# Altium PCB TMR_MAGSAT.PcbDoc
Units mm, origin at the board's own origin, x right, y up, seen from the top; angles counter-clockwise.
Board outline 56.29 x 51.29 mm, 4 copper layers (Top Layer, Layer 2(GND), Layer 3(PWR), Bottom Layer), stack 0.926 mm thick; 33 components, 20 nets, 115 pads, 15 vias.
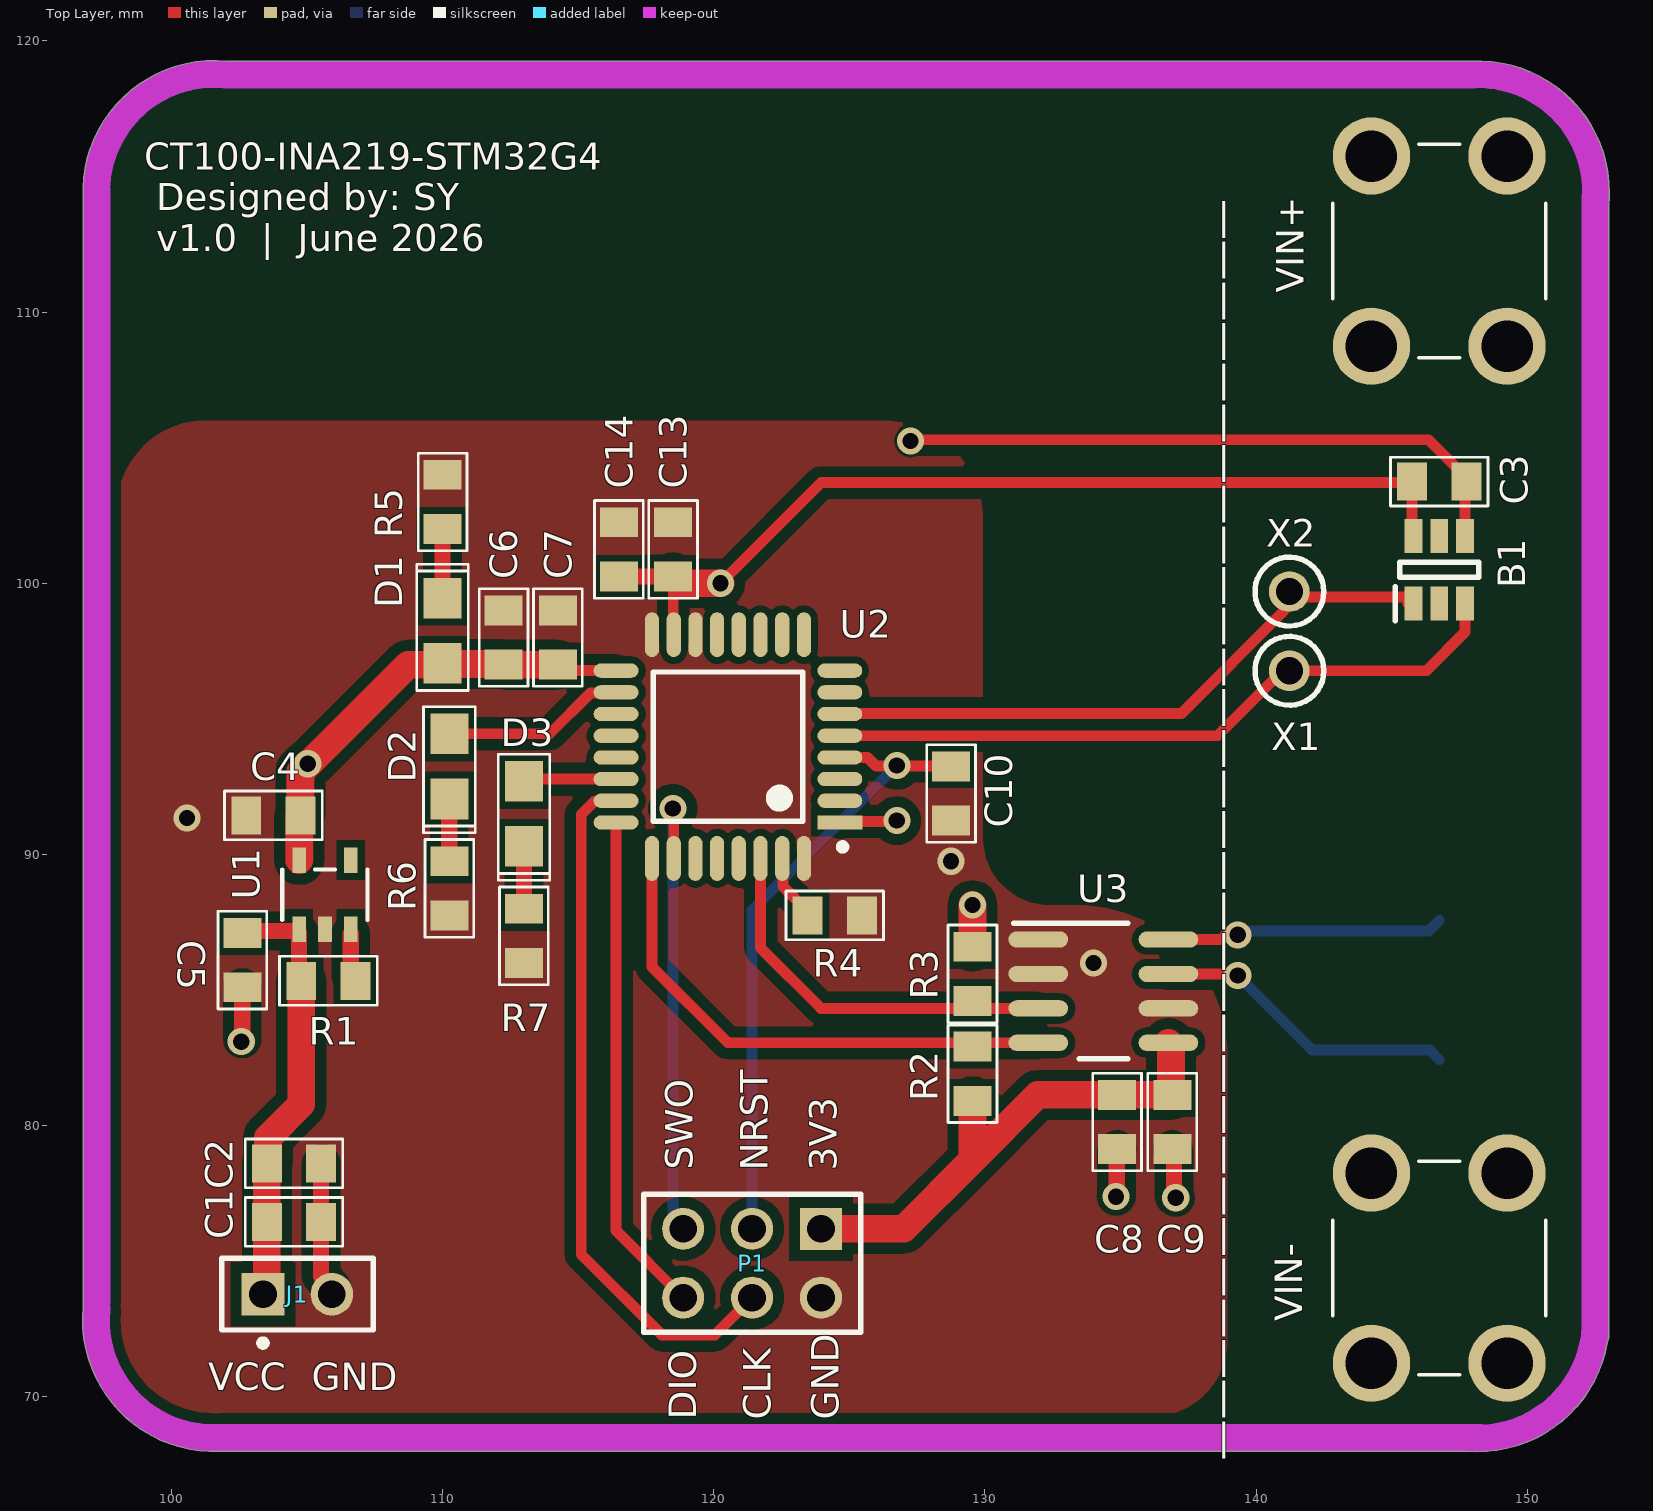
[diagram p0: Top Layer view]
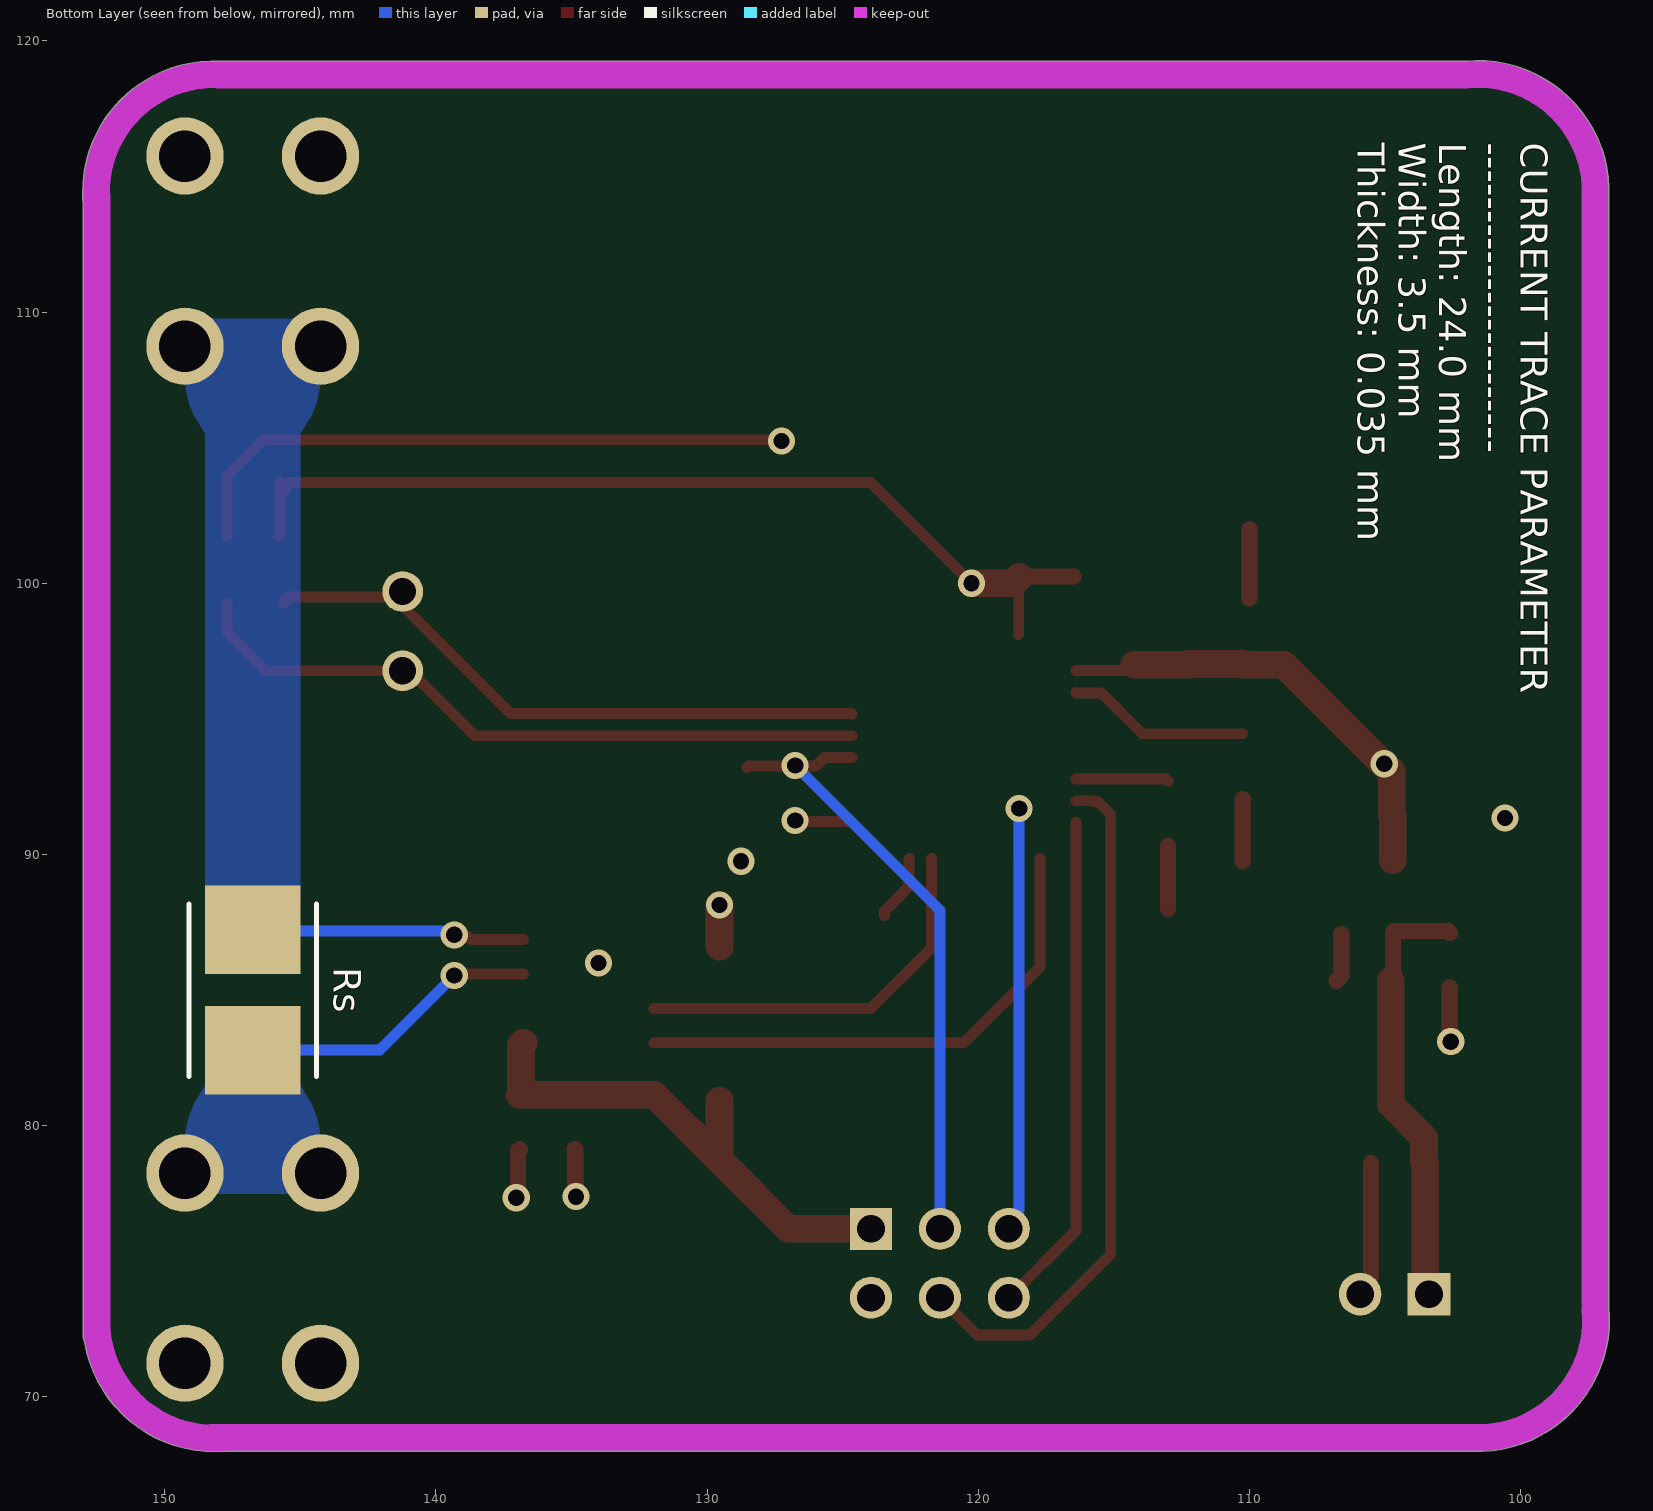
[diagram p1: Bottom Layer view, seen from below]
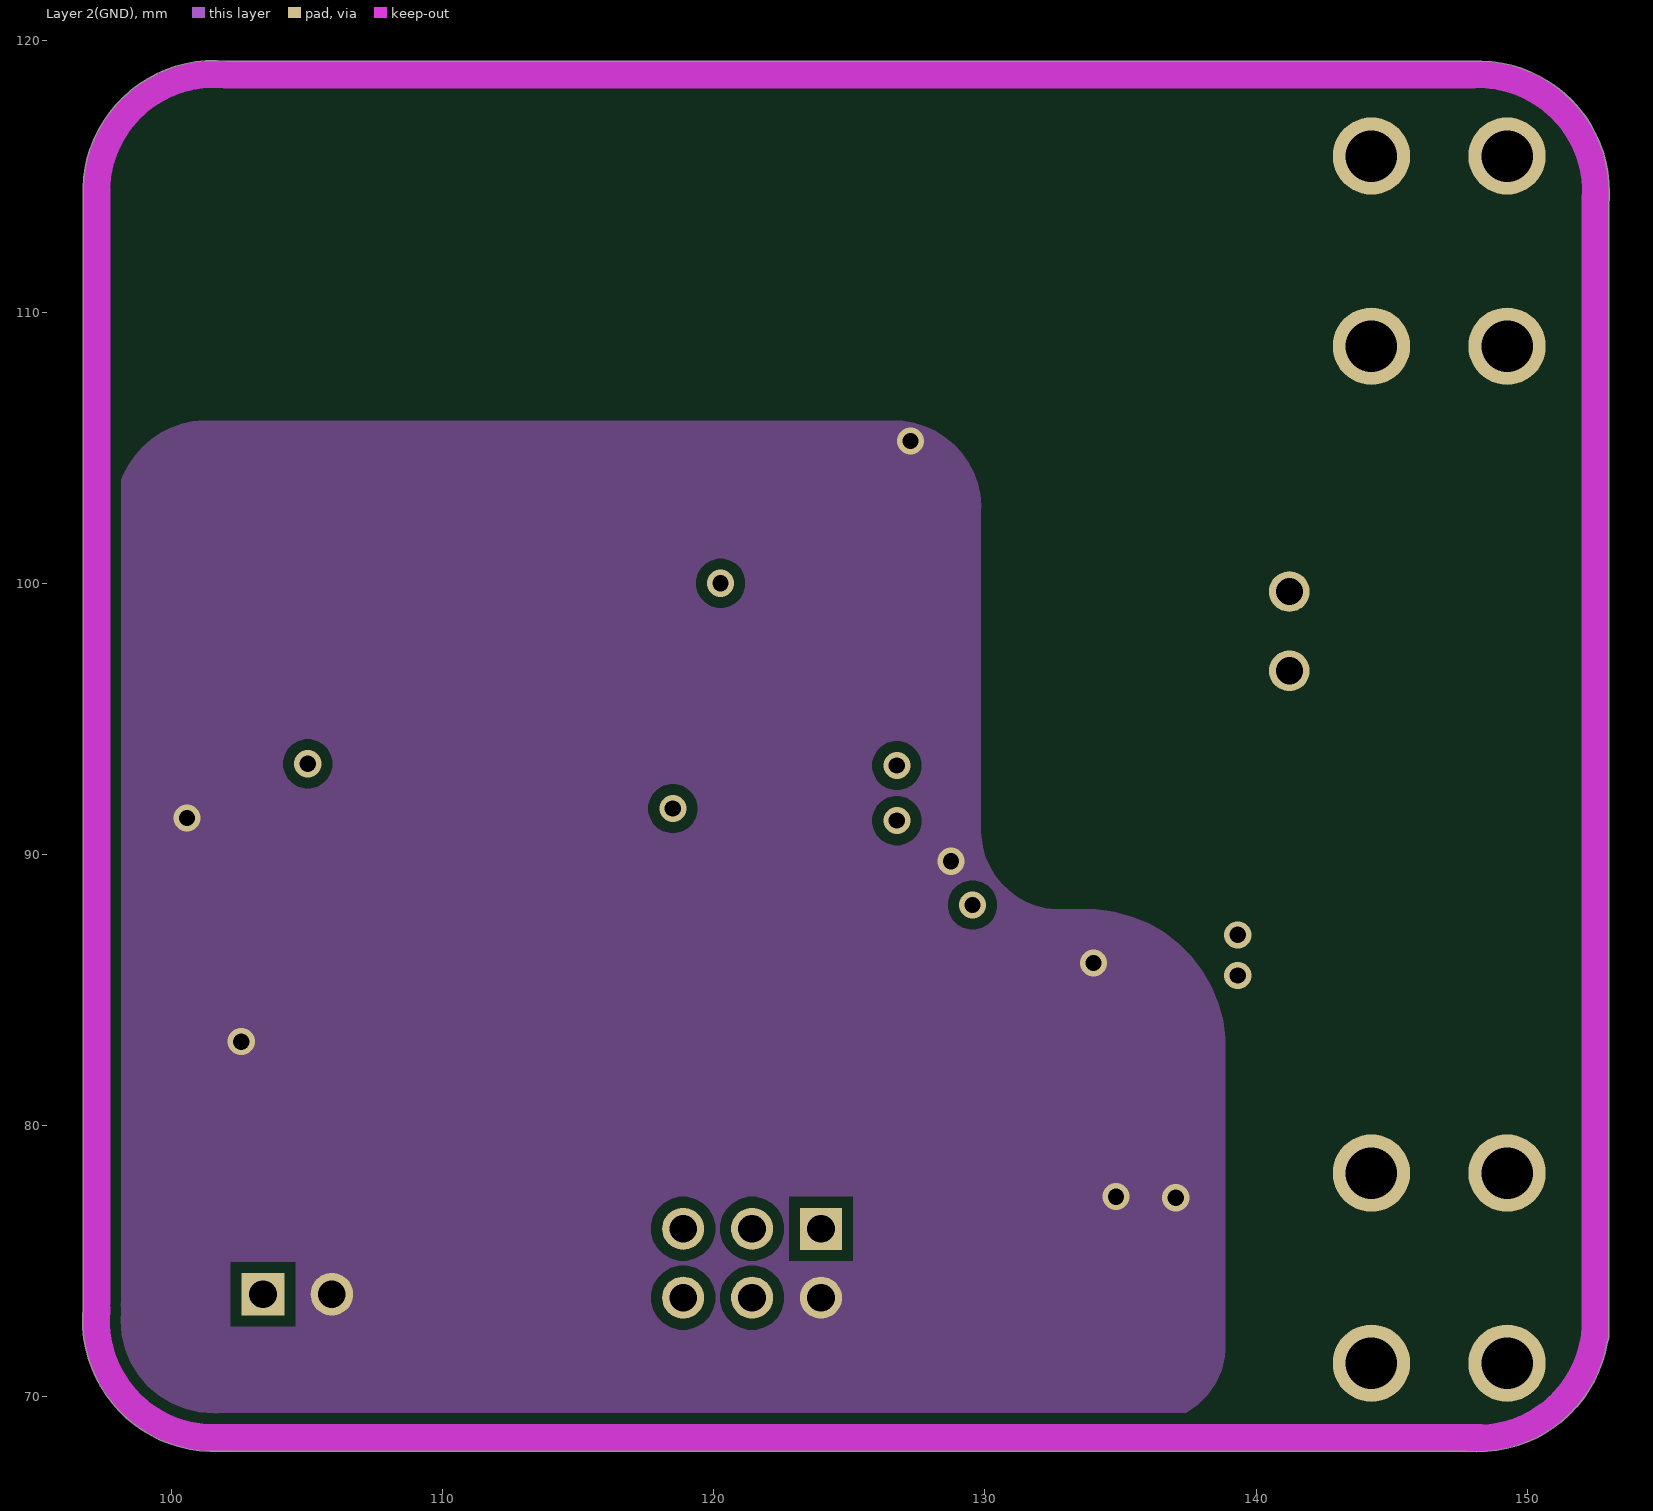
[diagram p2: Layer 2(GND)]
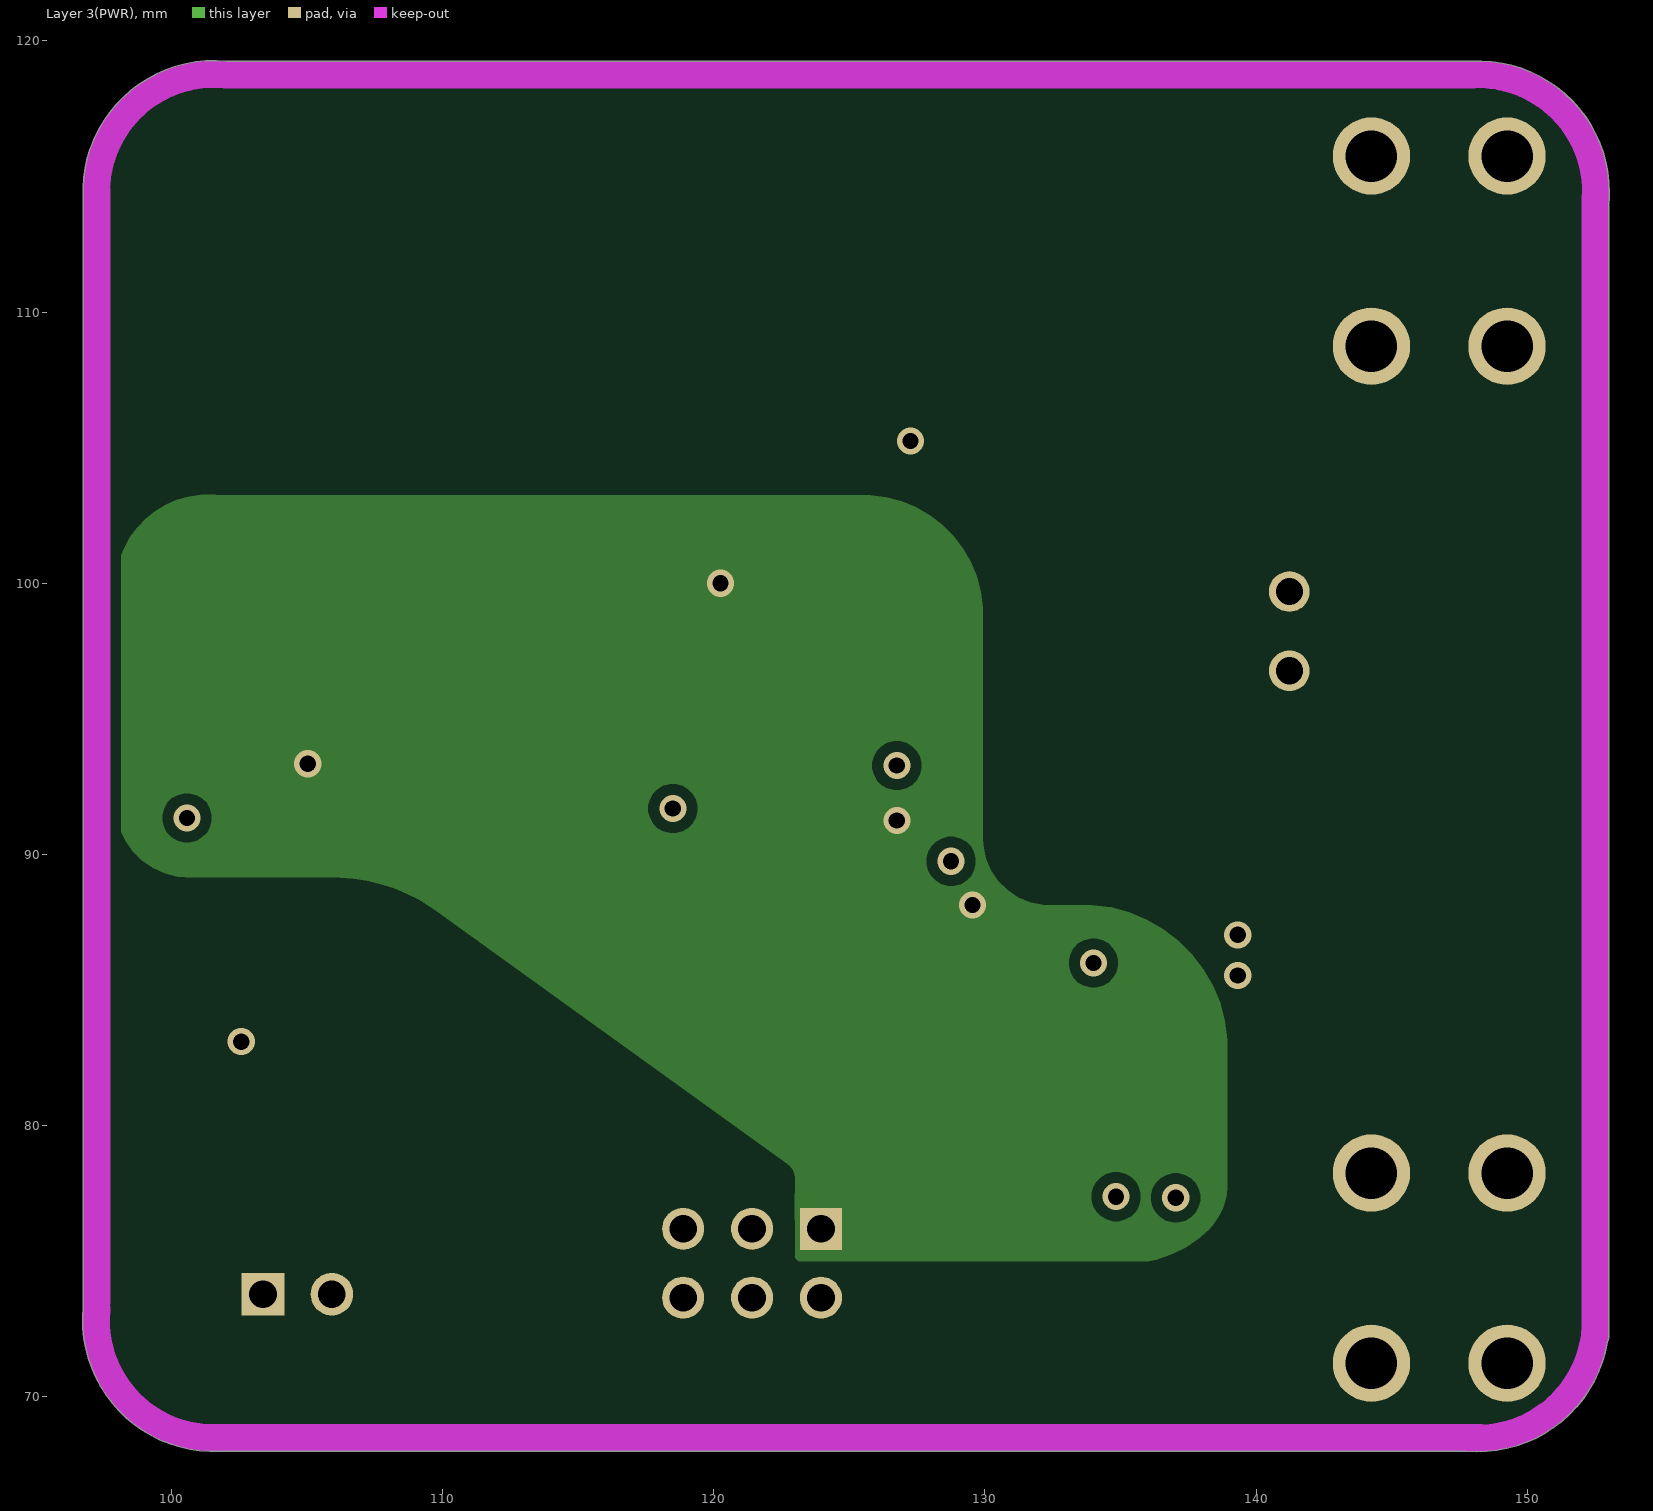
[diagram p3: Layer 3(PWR)]

## Layer stack, top to bottom
Top Solder: solder mask 0.0254, SM-001, Dk 4
Top Layer: signal copper 0.035
Dielectric 4: prepreg 0.1295, PP-017, Dk 4.3
Dielectric 2: prepreg 0.1295, PP-017, Dk 4.3
Layer 2(GND): signal copper 0.009
Dielectric 1: dielectric 0.32, FR-4, Dk 4.8
Layer 3(PWR): signal copper 0.009
Dielectric 3: prepreg 0.1295, PP-017, Dk 4.3
Dielectric 5: prepreg 0.1295, PP-017, Dk 4.3
Bottom Layer: signal copper 0.035
Bottom Solder: solder mask 0.0254, SM-001, Dk 4

## Board outline
96.752,73.299 ccw(c101.566,72.828) 101.806,67.997 101.836,68 147.726,68 ccw(c148.172,72.816) 152.942,72.016 ccw(c152.5,72.25) 153,72.25 153,72.531 ccw(c148.172,72.816) 153.009,72.816 ccw(c148.176,72.816) 153.003,73.056 153,73.087 153,113.976 ccw(c148.184,114.422) 153.021,114.422 ccw(c148.184,114.422) 147.944,119.253 147.913,119.25 102.024,119.25 ccw(c101.578,114.434) 96.747,114.194 96.75,114.163

## Design rules (kind name [scope] priority, off if disabled: settings)
Clearance [All] p1: gap=0.4 ignorepadtopadclearanceinfootprint=TRUE except(0.254: Track-SMDPad SMDPad-Poly)
Height [All] p1: minheight=0 maxheight=20 prefheight=12.7
HoleSize [All] p1: absolutevalues=TRUE maxlimit=10 minlimit=0.4 maxpercent=80.000 minpercent=20.000
PolygonConnect [All] p1: connectstyle=Direct reliefconductorwidth=0.6 reliefentries=4 polygonreliefangle="90 Angle" airgapwidth=0.4
RoutingVias [All] p1: holewidth=0.711 width=1.27 viastyle="Through Hole" minholewidth=0.711 minwidth=1.27 maxholewidth=0.711 maxwidth=1.27
SilkToSilkClearance [All] p1: silktosilkclearance=0.1
SilkToSolderMaskClearance [IsPad] p1: minsilkscreentomaskgap=0.1 clearancetoexposedcopper=TRUE
SolderMaskExpansion [All] p1: expansion=0.102 istentingtop=FALSE
Width [All] p1: maxlimit=1.016 minlimit=0.4 preferedwidth=0.6
26 further rules are at their usual default settings.

## Components (designator, comment, footprint, x,y, rotation, side; value= is the part's Value field where it differs from the comment)
B1 "CT100LW-FS6" SOT95P280X135-6N 146.75,100.5 r90 top
C1 "100n" "0805 CAP" 104.521,76.454 r0 top
C2 "100n" "0805 CAP" 104.521,78.613 r0 top
C3 "100n" "0805 CAP" 146.75,103.75 r0 top
C4 "1u" "0805 CAP" 103.759,91.44 r180 top
C5 "1u" "0805 CAP" 102.616,86.106 r270 top
C6 "4.7u" "0805 CAP" 112.25,98 r90 top
C7 "100n" "0805 CAP" 114.25,98 r90 top
C8 "10u" "0805 CAP" 134.874,80.137 r270 top
C9 "100n" "0805 CAP" 136.906,80.137 r270 top
C10 "100n" "0805 CAP" 128.75,92.25 r270 top
C13 "1u" "0805 CAP" 118.5,101.25 r90 top
C14 "10n" "0805 CAP" 116.5,101.25 r90 top
D1 "LTST-C170KGKT" "0805 LED" 110,98.25 r90 top
D2 "LTST-C170KGKT" "0805 LED" 110.25,93.25 r270 top
D3 "LTST-C170KGKT" "0805 LED" 113,91.5 r270 top
J1 "M20-9990245" FP-M20-9990245-MFG 104.648,73.787 r0 top
P1 "MTSW-103-07-F-D-244" SMTC-MTSW-103-07-X-D-244 123.952,76.2 r180 top
R1 "280" "0805 RES" 105.791,85.344 r0 top
R2 "10k" "0805 RES" 129.54,81.915 r270 top
R3 "10k" "0805 RES" 129.54,85.598 r90 top
R4 "10k" "0805 RES" 124.46,87.757 r180 top
R5 "120" "0805 RES" 110,103 r270 top
R6 "330" "0805 RES" 110.25,88.75 r90 top
R7 "330" "0805 RES" 113,87 r90 top
Rs "PA2512FKM7W0R001E" FP-PA2512E-0R001-0R004-IPC_A 146.75,85 r90 bottom value=1mΩ
U1 "NCP161ASN330T1G" SOT23_527AH_ONS 105.664,88.519 r90 top
U2 "STM32G431KBT6" FP-LQFP32-5V-IPC_B 120.523,93.98 r180 top
U3 "INA219AIDR" D0008A_N 134.366,84.963 r0 top
VIN+ "7771" KEYSTONE_7771 146.75,112.25 r180 top
VIN- "7771" KEYSTONE_7771 146.75,74.75 r180 top
X1 "5003" TP_TH 141.224,96.774 r270 top
X2 "5003" TP_TH 141.224,99.695 r270 top

## Footprints (in the part's own frame and the unit in brackets; to place one, negate y for a bottom-side part, rotate by r counter-clockwise, add the part's x,y. Pads: shape width x height; smd on the part's side, far side on the other; paste and mask are expansions set on the pad)
"0805 CAP" [mm] "http://www.digikey.co.nz/Web%20Export/Supplier%20Content/Vishay_8026/PDF/VishayBeyschlag_SolderPad.pdf?redirected=1 with dimension G modified by +0.25mm"
  rect 1.1x1.4 smd: 1(-1,0) 2(1,0)
  silkscreen extent -1.8,-0.9 1.8,0.9, body extent -1.04,-0.66 1.04,0.66, height 0.61
"0805 LED" [mm] "RED AS AlGaAs SMD LED, Body; 2mm x 1.25 mm (LxW)"
  rect 1.5x1.4 smd: 1(-1.2,0) 2(1.2,0)
  silkscreen extent -2.2,-0.95 2.45,0.95, body extent -1,-0.63 1,0.63, height 1.1
"0805 RES" [mm] "http://www.digikey.co.nz/Web%20Export/Supplier%20Content/Vishay_8026/PDF/VishayBeyschlag_SolderPad.pdf?redirected=1 with dimension G modified by +0.25mm"
  rect 1.1x1.4 smd: 1(-1,0) 2(1,0)
  silkscreen extent -1.8,-0.9 1.8,0.9, body extent -1.04,-0.66 1.04,0.66, height 0.61
D0008A_N [mm]
  oval 2.2x0.6 smd paste+0 mask+0.051: 1(-2.4,1.905) 2(-2.4,0.635) 3(-2.4,-0.635) 4(-2.4,-1.905) 5(2.4,-1.905) 6(2.4,-0.635) 7(2.4,0.635) 8(2.4,1.905)
  silkscreen extent -3.3,-2.5 0.9,2.5
FP-LQFP32-5V-IPC_B [mm]
  rect 1.655x0.526 smd paste+0 mask+0: 1(-4.125,2.8)
  rrect100% 1.655x0.526 smd paste+0 mask+0: 2(-4.125,2) 3(-4.125,1.2) 4(-4.125,0.4) 5(-4.125,-0.4) 6(-4.125,-1.2) 7(-4.125,-2) 8(-4.125,-2.8) 17(4.125,-2.8) 18(4.125,-2) 19(4.125,-1.2) 20(4.125,-0.4) 21(4.125,0.4) 22(4.125,1.2) 23(4.125,2) 24(4.125,2.8)
  rrect100% 0.526x1.655 smd paste+0 mask+0: 9(-2.8,-4.125) 10(-2,-4.125) 11(-1.2,-4.125) 12(-0.4,-4.125) 13(0.4,-4.125) 14(1.2,-4.125) 15(2,-4.125) 16(2.8,-4.125) 25(2.8,4.125) 26(2,4.125) 27(1.2,4.125) 28(0.4,4.125) 29(-0.4,4.125) 30(-1.2,4.125) 31(-2,4.125) 32(-2.8,4.125)
  silkscreen extent -4.35,-2.75 2.75,3.82, body extent -5.2,-5.2 5.2,5.2, height 0.25
FP-M20-9990245-MFG [mm]
  rect 1.57x1.57 hole 1.02 paste-2539.97 mask+0: 1(-1.27,0)
  round 1.57 hole 1.02 paste-2539.97 mask+0: 2(1.27,0)
  silkscreen extent -2.79,-1.92 2.79,1.32, body extent -2.89,-1.42 2.89,1.42, height 0.25
FP-PA2512E-0R001-0R004-IPC_A [mil]
  rect 128.5x139.17 smd paste+0 mask+0: 1(-87.42,0) 2(87.42,0)
  silkscreen extent -125,-93 125,93, body extent -125,-63 125,63, height 35
KEYSTONE_7771 [mm]
  round 2.85 hole 1.9: 1_1(-2.5,-3.505) 1_2(2.5,-3.505) 1_3(2.5,3.505) 1_4(-2.5,3.505)
  silkscreen extent -3.94,-3.94 3.94,3.94, body extent -3.26,-4.39 4.61,3.48, height 15.51
SMTC-MTSW-103-07-X-D-244 [mm] "Assembly .025\" [.64] SQ Post Terminal Strip, 2x3 Pins, Vertical, 2.54mm Pitch, Male"
  rect 1.55x1.55 hole 1.02: 1(0,0)
  round 1.55 hole 1.02: 2(0,2.54) 3(2.54,0) 4(2.54,2.54) 5(5.08,0) 6(5.08,2.54)
  silkscreen extent -1.46,-1.27 6.54,3.81, body extent -1.27,-1.27 6.35,3.81, height 8.74
SOT23_527AH_ONS [mil]
  rect 37.28x20 smd paste+0 mask+0: 1(-50.14,37.4) 2(-50.14,0) 3(-50.14,-37.4) 4(50.14,-37.4) 5(50.14,37.4)
  silkscreen extent -37,-62 37,62, body extent -55,-57 55,57, height 57
SOT95P280X135-6N [mm]
  rect 1.25x0.65 smd: 1(-1.25,0.95) 2(-1.25,0) 3(-1.25,-0.95) 4(1.25,-0.95) 5(1.25,0) 6(1.25,0.95)
  silkscreen extent -1.88,-1.45 0.28,1.63
TP_TH [mm] "Test Point, Through Hole, Dia 2.54mm"
  round 1.5 hole 1: 1(0,0)
  silkscreen extent -1.27,-1.27 1.27,1.27, body extent -1.27,-1.27 1.27,1.27, height 4.57

## Part data
B1: "Board Mount Hall Effect / Magnetic Sensors Differential TMR High Sensitivity Magnetic 1D Linear  Sensor ,SOT23 - 6 pin Package, F-Temp", Manufacturer_Name="Allegro Microsystems", Geometry.Height=1.35mm, Manufacturer_Part_Number=CT100LW-FS6
C1 C2 C3 C4 C5 C6 C7 C8 C9 C10 C13 C14: library part CerCap_SMT_0805, "SMT ceramic capacitor 0805 size"
D1 D2 D3: library part LED_SMT_0805, "SMT LED 0805 size", Color=Green, Current - Test=20mA, Lens Color=Colorless, Manufacturer="Lite-On Inc.", Millicandela Rating=35mcd, Package / Case="0805 (2012 Metric)", Supplier Part Number 1=160-1414-1-ND, Voltage - Forward (Vf) (Typ)=2V, Category=Optoelectronics, ComponentLink1Description=http://optoelectronics.liteon.com/upload/download/DS22-2000-073/LTST-C170KGKT.pdf, ComponentLink1URL=http://optoelectronics.liteon.com/upload/download/DS22-2000-073/LTST-C170KGKT.pdf, Features=-, Height (Max)=1.10mm, Lens Style/Size="Rectangle with Flat Top, 1.40mm x 1.25mm", Lens Transparency=Clear, Manufacturer Part Number=LTST-C170KGKT, Mounting Type="Surface Mount", Packaging="Cut Tape (CT)", Part Status=Active, Pricing 1="1=0.62, 10=0.459, 25=0.338, 100=0.2415, 250=0.16416, 500=0.14486, 1000=0.11347 (NZD)", RoHS="RoHS Compliant", Size / Dimension="2.00mm L x 1.25mm W", Stock 1=503069, Supplier 1=Digi-Key, Viewing Angle=130°, Wavelength - Dominant=571nm, Wavelength - Peak=574nm
J1: library part CMP-15831-000105-1, "CONN HEADER VERT 2POS 2.54MM", Case/Package=SIL, Color=Black, Contact Resistance=25mR, Current=3A, Flammability Rating="UL94 V-0", Insulation Resistance=10GR, Max Operating Temperature=105°C, Min Operating Temperature=-40°C, Package Quantity=1000, Voltage=50V, Voltage Rating (AC)=750V, Connector Type="Male Pin", Contact Finish - Mating=GOLD, Contact Material=Brass, Contact Mating Length=0.24inch, Contact Plating=Gold, Contact Shape=Square, Contact Type="Male Pin", Current Rating=3A, Depth=2.54mm, Fastening Type=Pull, Gender=Male, Height=0.12inch, Housing Color=Black, Housing Material=Nylon, Insulation Color=Black, Insulation Material=Nylon, Lead Pitch=2.54mm, Length=5.08mm, Mated Stacking Heights=16.54mm, Mating Cycles=300, Max Current Rating=3A, Mount="Through Hole", Number of Contacts=2, Number of Poles=2, Number of Positions=2, Number of Rows=1, Orientation=Straight, Packaging=Bulk, Pitch=2.54mm, Radiation Hardening=No, Reach SVHC Compliant=Yes, Series=M20, Termination=Solder, Weight=0.25lb, Width=0.25inch, Working Voltage=750V
P1: library part CMP-1024-00098-1, "Modified .025\" SQ Post Header, Through-hole, Vertical, -55 to 125 degC, 2.54 mm Pitch, 6-Pin, Male, RoHS", Manufacturer=Samtec, Temperature Range="-55 to 125 degC", ComponentLink1Description="Manufacturer URL", ComponentLink1URL=http://www.samtec.com, ComponentLink2Description=Datasheet, ComponentLink2URL=http://www.samtec.com/documents/webfiles/pdf/MTSW.PDF, ComponentLink3Description="Package Specification", ComponentLink3URL=http://www.samtec.com/documents/webfiles/cpdf/MTSW-XXX-XX-X-X-XXXX-XX-XXX-MKT1.pdf, DatasheetVersion=F-214, Mounting Technology=Through-hole, Orientation=Vertical, PackageDescription="Assembly .025\" [.64] SQ Post Terminal Strip", PackageReference=MTSW-103-07-X-D-244, PackageVersion="BI, 2/1987", PartNumber=MTSW-103-07-F-D-244, Pitch="2.54 mm", RoHS=True
R1 R2 R3 R4 R5 R6 R7: library part Res_SMT_0805, "0805 resistor", ComponentLink1Description=https://nz.mouser.com/datasheet/2/315/AOA0000C304-1149620.pdf, LatestRevisionDate=17-Jul-2002, LatestRevisionNote="Re-released for DXP Platform.", PackageReference=AXIAL-0.4, Published=8-Jun-2000, Publisher="Altium Limited"
Rs: library part CMP-03412-024792-1, "METAL CURRENT SENSOR 2512 1% 75P", Manufacturer=Yageo, Package=PA2512E-0R001-0R004, Power Rating=2W, Resistance=1mΩ, Temperature="-55°C to +170°C", Temperature Coefficient=75ppm/°C, Temperature Range High=+170°C, Temperature Range Low=-55°C, Tolerance=1%, Automotive=Yes, Automotive Grade="Grade 0", Category=Res, ComponentLink2Description=Datasheet, ComponentLink2URL=http://www.yageo.com/documents/recent/PYu-PA_E_51_RoHS_10.pdf, Composition="Metal Element", Device Class L1="Passive Components", Device Class L2=Resistors, Device Class L3="Chip SMD Resistors", Digikey Description="METAL CURRENT SENSOR 2512 1% 75P", Height=0.88mm, Ipc Land Pattern Name=RESC635318X63, Lead Free=Yes, Manufacturer Part Number=PA2512FKM7W0R001E, Octopart=https://octopart.com/pa2512fkm7w0r001e-yageo-94661137, RoHS=TRUE, Series=PA_E
U1: "Description", Manufacturer_Name=onsemi, Copyright="Copyright (C) 2026 Ultra Librarian. All rights reserved.", Manufacturer_Part_Number=NCP161ASN330T1G, RefDes=RefDes, Type=Type
U2: library part CMP-12105-000140-1, "IC MCU 32BIT 128KB FLASH 32LQFP"
U3: "26-V 12-bit I2C output digital power monitor 8-SOIC -40 to 125", Alternate_PartNumber=INA219BID, Manufacturer="Texas Instruments", PartNumber=INA219BIDR, CompType=IC, Copyright="Copyright (C) 2026 Ultra Librarian. All rights reserved.", Manufacturer_Name="Texas Instruments", Manufacturer_Part_Number=INA219AIDR, MountType=SMT, PackageReference=D0008A, RefDes=RefDes, RoHS=Y, Type=TYPE
VIN+ VIN-: "Screw Terminal;Nickel;15 Amp;Thru-Hole;Vertical;Unassembled;PC;M3", Package=None, Check_prices=https://www.snapeda.com/parts/7771/Keystone/view-part/?ref=eda, MF="Keystone Electronics", MP=7771, SnapEDA_Link=https://www.snapeda.com/parts/7771/Keystone/view-part/?ref=snap
X1 X2: library part TestPoint, "Test Point, Orange, 1-Pin THD, RoHS", Forward Current="3 A", Forward Voltage="1.08 V", Max Operating Temperature="150 degC", Max Surge Current="80 A", Min Operating Temperature="-65 degC", Package Quantity=500, Peak Reverse Current="600 uA", ComponentLink1Description="Manufacturer URL", ComponentLink1URL=http://www.keyelco.com/, ComponentLink2Description=Datasheet, ComponentLink2URL=http://keyelco.com/userAssets/file/M65p56.pdf, DatasheetVersion=Jun-15, Diameter="5.3 mm", Height="0.25 inch", Length="9.5 mm", Mount="Through Hole", PackageDescription="1-Pin Through Hole Device, Dia 2.54 mm", PackageReference=5003, Packaging=Bulk, Pins=2, Radiation Hardening=No, REACH SVHC="No SVHC", RoHSCompliant=true, Weight="0.01 lb", Width="0.25 inch"

## Via types
v1: diameter 1, hole 0.6, Top Layer to Bottom Layer, tented both sides, 15 vias

## Nets (pads, with @x,y where several pads share a name; then routed paths per layer and width w, separated by ;. In a path a pad name is that pad's centre, name@x,y a point inside that pad or via, vN(x,y) a via of type N, cw(c..) or ccw(c..) an arc to the next point about the centre after c; other vN are vias at no path point)
3V3: B1.6 C3.1 C4.1 C6.1 C7.1 C8.1 C9.1 C13.1 C14.1 D1.1 P1.1 R2.2 R3.2 U1.5 U2.1 U2.15 U2.17 U3.5 | length 74.5
  Top Layer w0.4: C7.1 114.47,96.78 U2.17 ; C13.1@118.507,100.187 118.507,98.121 U2.15 ; v1(120.25,100) 123.961,103.711 145.4,103.711 145.475,103.586 C3.1@145.6,103.377 ; U2.1 124.683,91.215 126.715,91.215 v1(126.75,91.25) ; C3.1 145.75,101.8 B1.6
  Top Layer w0.6: C14.1 118.444,100.25 118.471,100.223 C13.1@118.507,100.187
  Top Layer w1.016: U1.5 104.717,89.796 104.717,91.398 C4.1 104.759,93.075 v1(105.029,93.345) ; v1@105.113,93.385 108.727,97 110.2,97 110.25,97.05 110.275,97.025 112.225,97.025 C6.1 C7.1 ; C13.1@118.471,100.223 118.475,100.227 C13.1@118.484,100.234 ; C13.1@118.507,100.187 118.694,100 v1(120.25,100) ; P1.1 127.003,76.2 129.54,78.737 ; R2.2 129.54,78.737 ; R3.2 v1(129.54,88.138) ; U3.5 136.859,82.965 136.859,81.179 C9.1@136.901,81.137 ; C9.1 C9.1@136.901,81.137 ; 129.54,78.737 131.94,81.137 C8.1 C9.1@136.901,81.137
GND: B1.4 C1.2 C2.2 C3.2 C4.2 C5.2 C6.2 C7.2 C8.2 C9.2 C10.2 C13.2 C14.2 J1.2 P1.2 R4.1 R5.1 R6.1 R7.1 U1.2 U2.14 U2.16 U2.32 U3.1 U3.2 U3.6 | length 33.8
  Top Layer w0.4: v1(127.25,105.25) 127.294,105.294 146.356,105.294 147.7,103.95 B1.4
  Top Layer w0.6: v1@102.616,83.185 C5.2 ; C2.2 C1.2 105.521,74.446 105.918,74.049 J1.2 ; v1(134.834,77.383) 134.854,77.404 134.854,79.117 C8.2 ; C9.2 136.969,79.073 136.969,77.406 v1(137.033,77.343)
  other v1: 102.576,83.098 134,86 128.75,89.75 100.576,91.348
NetD1_2: D1.2 R5.2 | length 2.5
  Top Layer w0.6: D1.2 R5.2
NetD2_1: D2.1 U2.18 | length 6.8
  Top Layer w0.4: D2.1 113.95,94.45 115.456,95.956 116.372,95.956 U2.18@116.396,95.98
NetD2_2: D2.2 R6.2 | length 2.3
  Top Layer w0.6: R6.2 D2.2
NetD3_1: D3.1 U2.22 | length 3.4
  Top Layer w0.4: D3.1 113.08,92.78 U2.22
NetD3_2: D3.2 R7.2 | length 2.3
  Top Layer w0.6: R7.2 D3.2
NetR1_2: R1.2 U1.3 | length 1.8
  Top Layer w0.6: U1.3@106.618,87.072 106.618,85.517 R1.2
NetR4_2: R4.2 U2.31 | length 2.5
  Top Layer w0.4: U2.31 122.547,89.83 122.547,88.82 123.46,87.907 R4.2
NRST: C10.1 P1.3 U2.4 | length 23.3
  Top Layer w0.4: U2.4 125.67,93.58 125.982,93.268 126.738,93.268 v1(126.75,93.28) 126.765,93.265 128.461,93.265 C10.1@128.524,93.202
  Bottom Layer w0.4: P1.3 121.412,87.942 v1(126.75,93.28)
SCL: R2.1 U2.25 U3.4 | length 19.4
  Top Layer w0.4: U2.25 117.723,85.858 120.523,83.058 129.54,83.058 U3.4
SDA: R3.1 U2.30 U3.3 | length 14.5
  Top Layer w0.4: U2.30 121.723,86.557 123.952,84.328 129.286,84.328 U3.3
SWCLK: P1.6 U2.24 | length 18.5
  Top Layer w0.4: U2.24 116.398,76.134 P1.6
SWDIO: P1.4 U2.23 | length 25.8
  Top Layer w0.4: U2.23 115.799,91.98 115.775,91.956 115.595,91.956 115.116,91.477 115.116,75.257 118.088,72.285 120.037,72.285 P1.4
SWO: P1.5 U2.26 | length 17.5
  Top Layer w0.4: v1(118.491,91.694) 118.523,91.662 U2.26
  Bottom Layer w0.4: v1(118.491,91.694) 118.491,76.892 118.872,76.511 P1.5
VCC: C1.1 C2.1 C5.1 J1.1 R1.1 U1.1 | length 16.1
  Top Layer w0.6: C5.1 102.686,87.176 104.668,87.176 104.71,87.134 104.71,85.425 R1.1
  Top Layer w1.016: J1.1 103.521,73.93 C2.1 103.563,78.655 103.563,79.56 104.791,80.788 R1.1
VIN+: Rs.2 U3.8 VIN+.1_3 VIN+.1_4 | length 9.9
  Top Layer w0.4: U3.8 138.706,86.868 138.838,87 v1@139,87
  Bottom Layer w0.4: v1(139.319,87.037) 139.481,87.037 139.619,87.175 146.359,87.175 Rs.2@146.75,87.565
VIN-: Rs.1 U3.7 VIN-.1_1 VIN-.1_2 | length 11
  Top Layer w0.4: U3.7 138.902,85.598 v1@139,85.5
  Bottom Layer w0.4: v1(139.319,85.537) 142.069,82.787 146.398,82.787 Rs.1@146.75,82.435
X1: B1.3 U2.5 X1.1 | length 25.7
  Top Layer w0.4: U2.5 138.576,94.38 140.97,96.774 X1.1 146.274,96.774 147.7,98.2 B1.3
X2: B1.1 U2.6 X2.1 | length 23.4
  Top Layer w0.4: U2.6 124.673,95.204 137.241,95.204 141.014,98.977 141.014,99.485 X2.1 141.419,99.5 145.475,99.5 145.6,99.375 B1.1@145.6,99.25
pads on no net: B1.2 B1.5 U1.4 U2.2 U2.3 U2.7 U2.8 U2.9 U2.10 U2.11 U2.12 U2.13 U2.19 U2.20 U2.21 U2.27 U2.28 U2.29 VIN+.1_1 VIN+.1_2 VIN-.1_3 VIN-.1_4

## Polygon pours and split planes (outlines as drawn)
GND on Top Layer "GND_L01_P006" (solid, pour order 6): 98,102.75 97.75,74.756 97.75,72.25 ccw(c101.809,73.287) 101.861,69.098 ccw(c102.852,89.003) 105.5,69.25 136.25,69.25 ccw(c136.049,72.139) 138.938,71.938 138.938,82.562 ccw(c133.362,82.562) 133.362,88.138 132.362,88.138 cw(c132.362,90.579) 129.921,90.579 129.921,102.329 ccw(c126.25,102.329) 126.25,106 101,106 ccw(c101.3,102.714)
3V3 on Top Layer "3V3_L01_P007" (solid, pour order 7): 104.013,89.281 106.045,89.281 106.045,94.361 104.013,94.361
VIN- on Bottom Layer "VIN-_L04_P013" (solid, pour order 13): 144.25,77.5 144.25,79.347 cw(c147.509,79.347) 144.714,81.024 145,81.5 cw(c146.75,75.5) 148.5,81.5 148.786,81.024 cw(c145.992,79.347) 149.25,79.347 149.25,77.5
VIN+ on Bottom Layer "VIN+_L04_P014" (solid, pour order 14): 149.25,109.75 149.25,107.653 cw(c145.991,107.653) 148.786,105.976 148.35,105.25 145.15,105.25 144.714,105.976 cw(c147.509,107.653) 144.25,107.653 144.25,109.75
VIN+ on Bottom Layer "VIN+_L04_P011" (solid, pour order 11): 145,88.25 145,105.5 148.5,105.5 148.5,88.25
3V3 on Layer 3(PWR) "3V3_L03_P004" (solid, pour order 4): 123.17,75 136.03,75 ccw(c135.143,79.381) 138.141,76.066 ccw(c136.519,77.86) 138.938,77.86 138.938,82.812 ccw(c133.613,82.813) 133.612,88.138 132.362,88.138 cw(c132.362,90.579) 129.921,90.579 129.921,98.829 ccw(c125.5,98.829) 125.5,103.25 101.75,103.25 ccw(c101.369,99.846) 97.963,100.213 97.963,91.683 ccw(c100.641,91.85) 100.473,89.173 ccw(c100.846,92.837) 100.846,89.154 105.965,89.154 cw(c105.966,82.661) 109.78,87.916 122.713,78.596 cw(c122.383,78.07) 123,78.002 ccw(c217.109,77) 123,75.998 123,75.25 ccw(c123.213,75.212)
GND on Layer 2(GND) "GND_L02_P016" (solid, pour order 16): 97.93,102.56 97.68,74.566 97.68,72.06 ccw(c101.738,73.097) 101.79,68.908 ccw(c102.781,88.814) 105.43,69.06 136.179,69.06 ccw(c135.978,71.949) 138.867,71.748 138.868,82.883 ccw(c133.776,82.883) 133.776,87.974 132.806,87.974 cw(c132.772,90.895) 129.851,90.861 129.851,102.649 ccw(c126.625,102.775) 126.75,106 101,106 ccw(c101.37,102.58)

## Keep-outs
Keep-Out Layer:
  lines w1: 97.247,114.219 cw(c101.578,114.434) 102,118.75 148,118.75 ; 97.25,73.25 ccw(c101.566,72.828) 101.781,68.497 ; 97.25,73.5 97.25,114.5 ; 101.75,68.5 148.25,68.5 ; 147.75,68.5 ccw(c148.172,72.816) 152.503,73.031 ; 147.969,118.753 cw(c148.184,114.422) 152.5,114 ; 152.5,72.25 152.5,114.25

## Silkscreen, mask and mechanical layers (free items; w line width, h text height)
Top Overlay:
  text "CT100-INA219-STM32G4 /  Designed by: SY                     /  v1.0  |  June 2026" at 99,112.25 h1
  text "SWO" at 119.23,78.382 h1.02 r90
  text "NRST" at 121.986,78.345 h1.02 r90
  text "3V3" at 124.526,78.345 h1.02 r90
  text "VCC" at 101.369,70.254 h1.02
  text "GND" at 105.179,70.254 h1.02
  text "DIO" at 119.35,69.15 h1.02 r90
  text "CLK" at 122.1,69.15 h1.02 r90
  text "GND" at 124.6,69.15 h1.02 r90
  text "| / | / | / | / | / | / | / | / | / | / | / | / | / | / | / | / | / | / | / | / | / | / | / | / | / | / | / | / | / | / |" at 138.589,68.057 h1
Bottom Overlay:
  text "CURRENT TRACE PARAMETER / ----------------------- / Length: 24.0 mm / Width: 3.5 mm / Thickness: 0.035 mm" at 106,116.25 h1 r90

## Text inside footprints (layer, text, board x,y; h text height)
U1: Top 3D Body "*" at 105.425,87.655 h1.27 r90